# Altium PCB RD15002SCT拼板20160225.PcbDoc (part 1 of 2)
Units mil, origin at the board's own origin, x right, y up, seen from the top; angles counter-clockwise.
Board outline 2710 x 2010 mil, 2 copper layers (Top Layer, Bottom Layer); 365 components, 184 nets, 1158 pads, 288 vias.
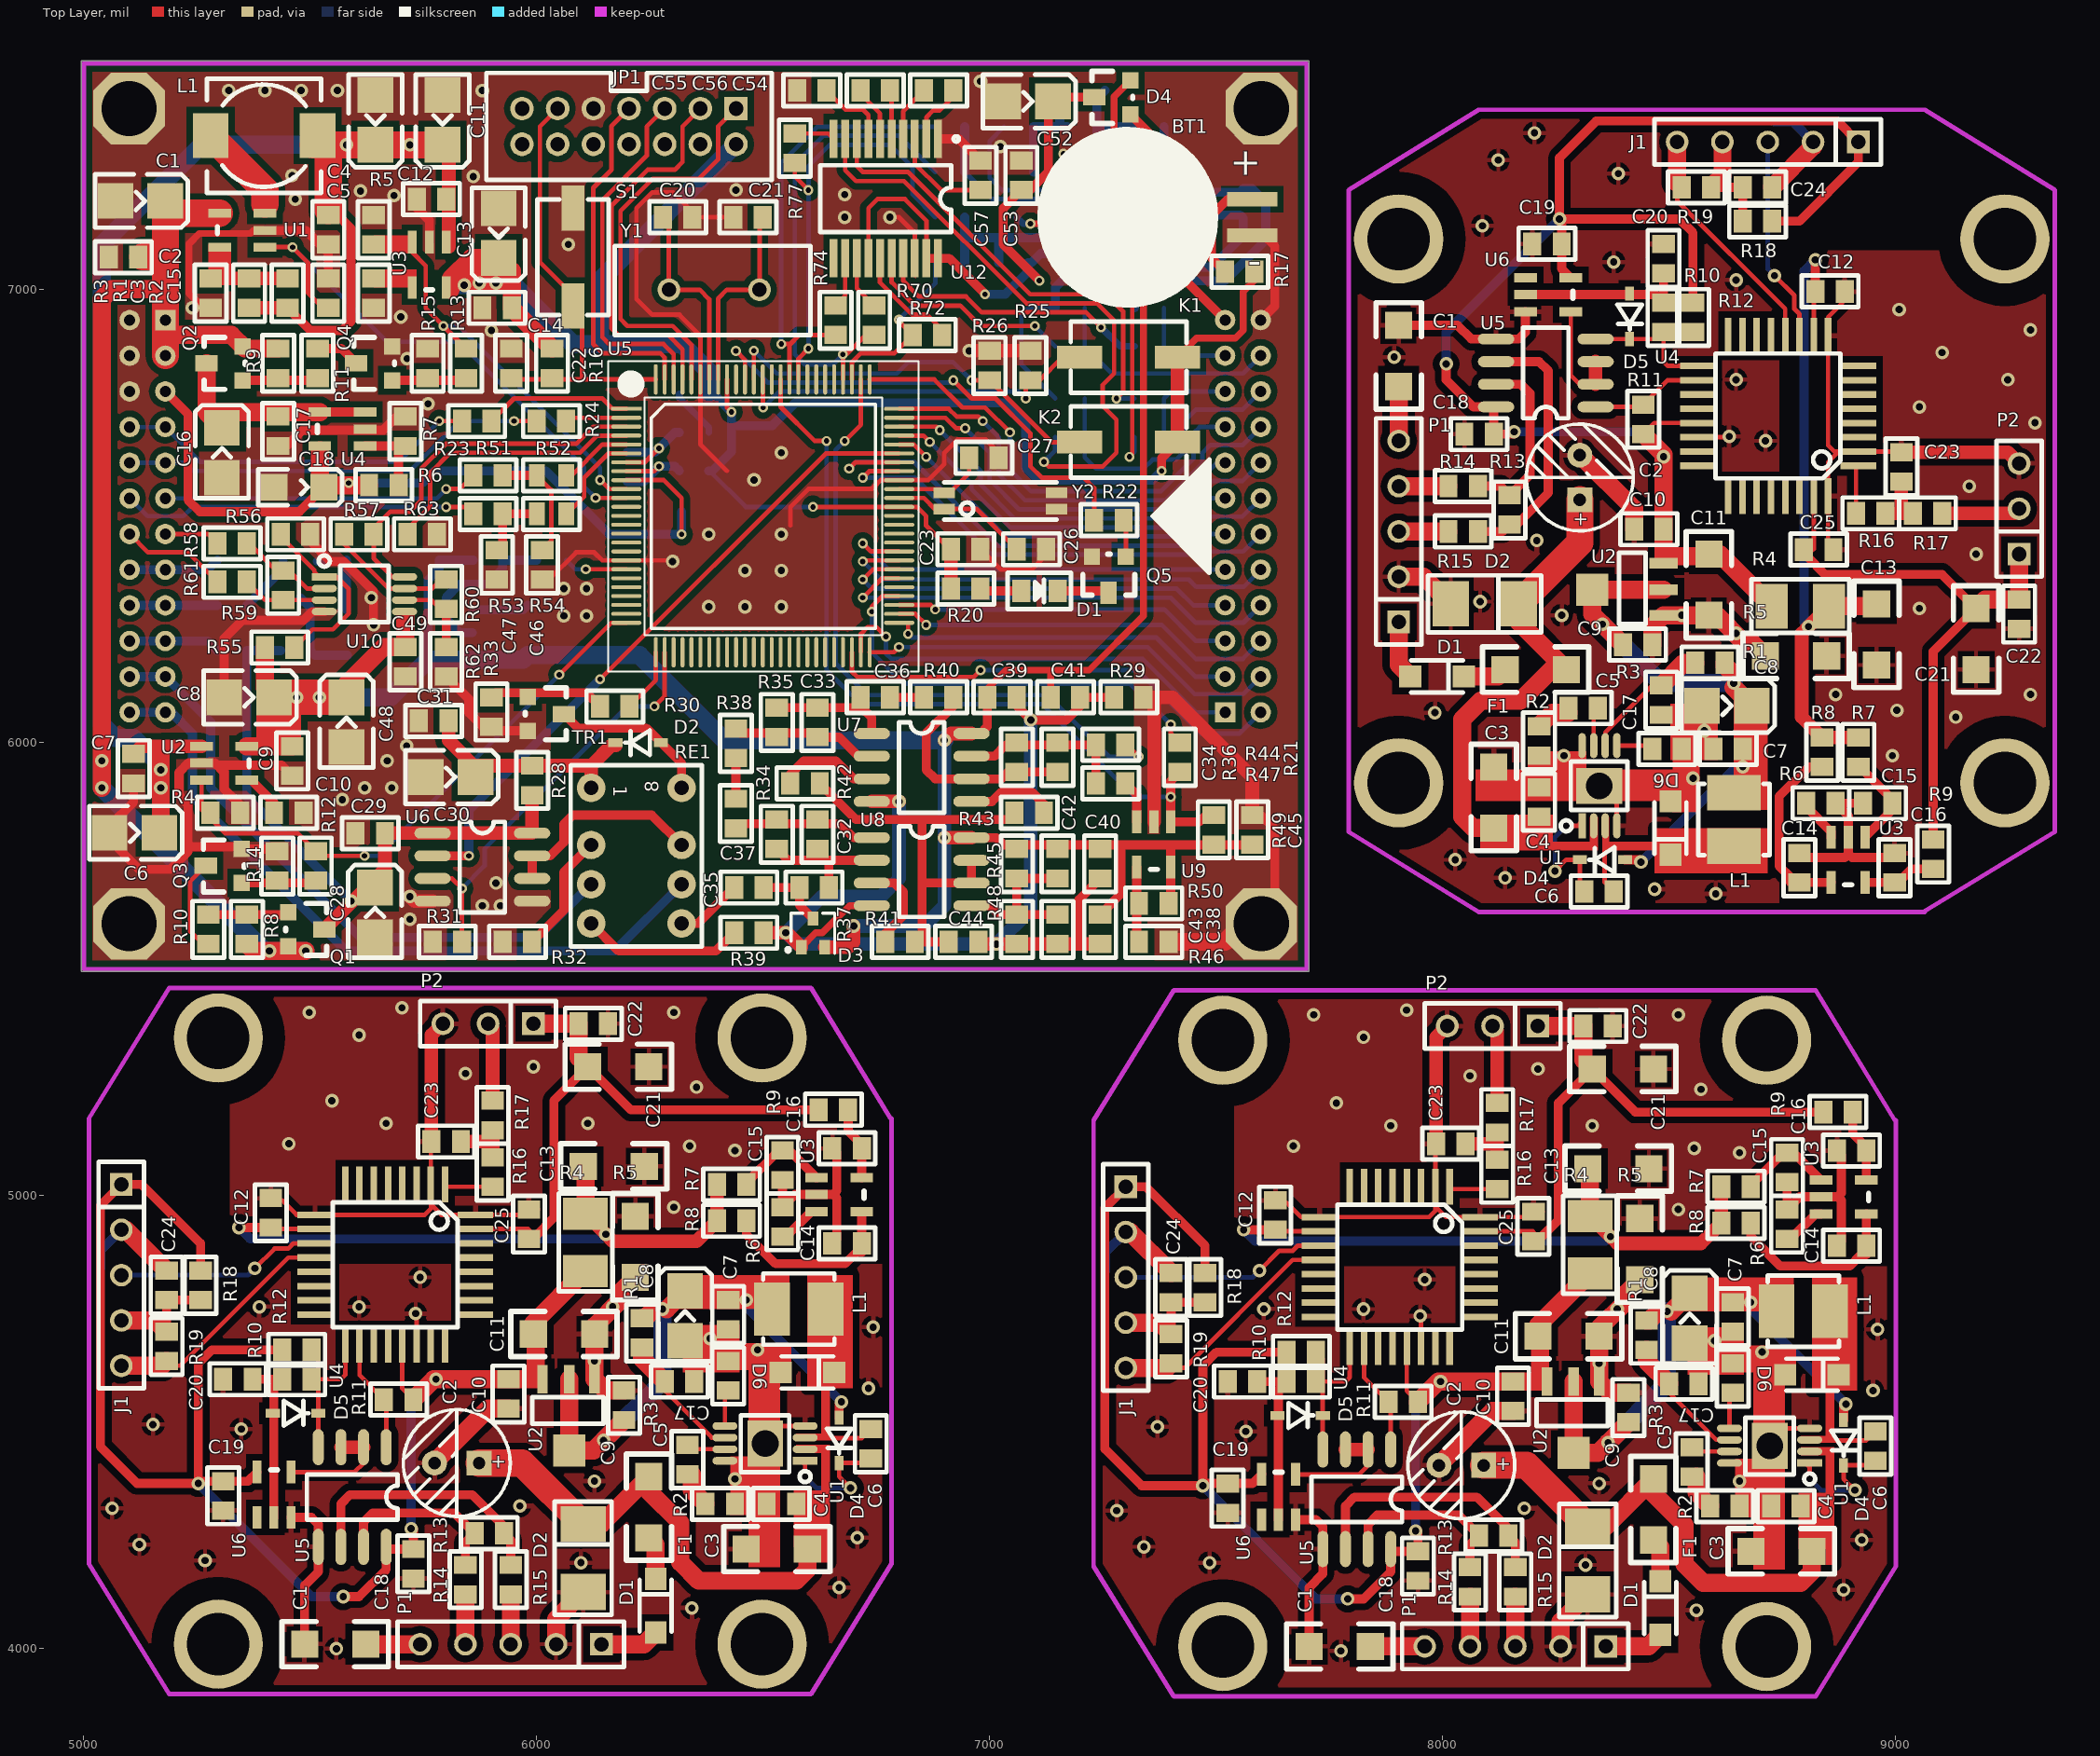
[diagram p0: Top Layer view]
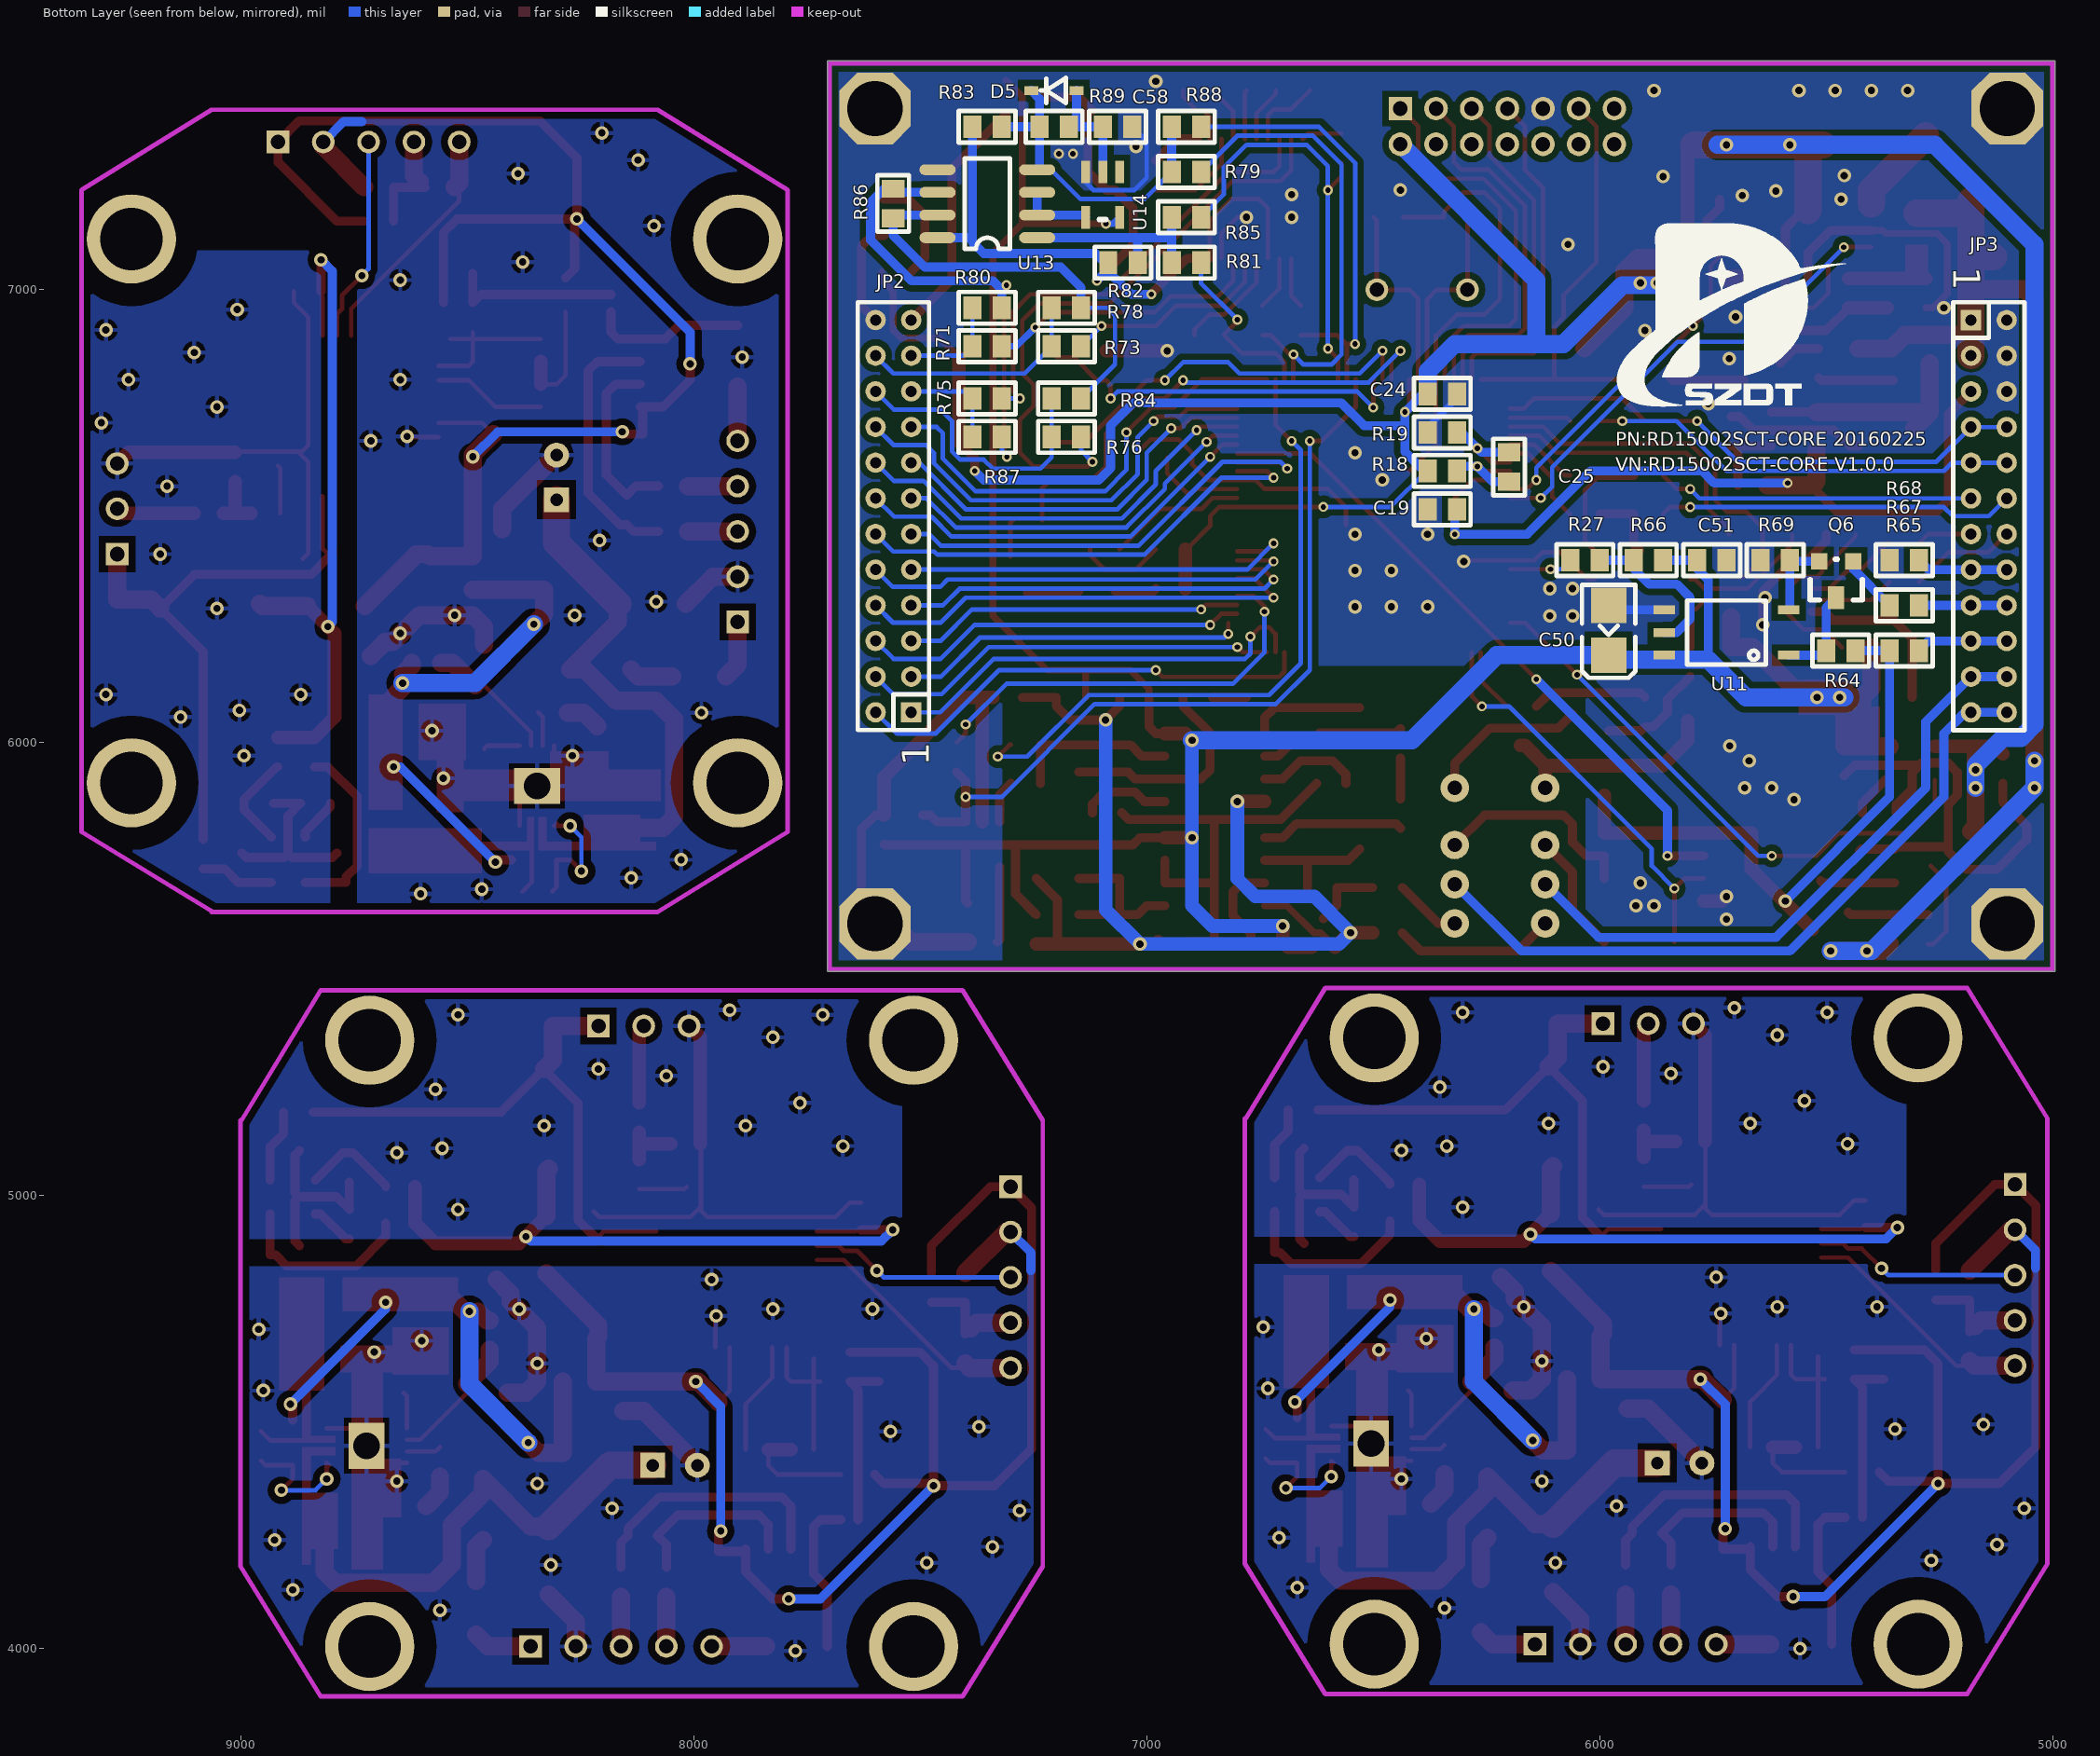
[diagram p1: Bottom Layer view, seen from below]

## Layer stack, top to bottom
Top Layer: signal copper 1.4
Dielectric: dielectric 12.6, FR-4, Dk 4.8
Bottom Layer: signal copper 1.4

## Board outline
4995,5495 7705,5495 7705,7505 4995,7505 4995,5495

## Design rules (kind name [scope] priority, off if disabled: settings)
Clearance [All] p1: gap=6
ComponentClearance [All] p1 off: gap=10 collisioncheckmode=3 verticalgap=10 showdistances=FALSE
HoleSize [All] p1: absolutevalues=TRUE maxlimit=1000 minlimit=1 maxpercent=80.000 minpercent=20.000
MinimumSolderMaskSliver [All] p1 off: minsoldermaskwidth=10
NetAntennae [All] p1 off: netantennaetolerance=0
PolygonConnect [All] p1: connectstyle=Direct reliefconductorwidth=10 reliefentries=4 polygonreliefangle="90 Angle" airgapwidth=10
RoutingPriority [All] p1: routingpriority=1
RoutingVias [All] p1: holewidth=20 width=50 viastyle="Through Hole" minholewidth=28 minwidth=50 maxholewidth=28 maxwidth=50
SilkToSilkClearance [All] p1 off: silktosilkclearance=10
SilkToSolderMaskClearance [IsPad] p1 off: minsilkscreentomaskgap=10 clearancetoexposedcopper=TRUE
SolderMaskExpansion [All] p1: expansion=4
Width [All] p1: maxlimit=1000 minlimit=6 preferedwidth=10
21 further rules are at their usual default settings.

## Components (designator, comment, footprint, x,y, rotation, side; value= is the part's Value field where it differs from the comment)
BT1 "MS920T" MS920T 7580,7200 r0 top
C1 "0.1uF/1KV" CC1206 7705.73,4004.24 r0 top
C1 "0.1uF/1KV" CC1206 5487.73,4009.24 r0 top
C1 "0.1uF/1KV" CC1206 7903.24,6921.27 r270 top
C1 "22uF/16V" CB3528 5180,7196 r180 top
C2 "100uF/25V" EC2.5/6MM 8090.73,4404.24 r180 top
C2 "100uF/25V" EC2.5/6MM 5872.73,4409.24 r180 top
C2 "100uF/25V" EC2.5/6MM 8303.24,6536.27 r90 top
C2 "0.1uF" CC0603#1 5055,7071.94 r0 top
C3 "10uF" CC1206 8680.73,4214.24 r0 top
C3 "10uF" CC1206 6462.73,4219.24 r0 top
C3 "10uF" CC1206 8113.24,5946.27 r270 top
C3 "100pF" CC0603#1 5450,7025 r270 top
C4 "0.1uF" CC0603#1 8725.73,4314.24 r0 top
C4 "0.1uF" CC0603#1 6507.73,4319.24 r0 top
C4 "0.1uF" CC0603#1 8213.24,5901.27 r270 top
C4 "22uF/16V" CB3528 5644,7320 r90 top
C5 "1.5nF" CC0603#1 8550.73,4379.24 r90 top
C5 "1.5nF" CC0603#1 6332.73,4384.24 r90 top
C5 "1.5nF" CC0603#1 8278.24,6076.27 r0 top
C5 "0.1uF" CC0603#1 5540,7100 r90 top
C6 "10nF" CC0603#1 8955.73,4479.24 r270 top
C6 "10nF" CC0603#1 6737.73,4484.24 r270 top
C6 "10nF" CC0603#1 8378.24,5671.27 r180 top
C6 "22uF/16V" CB3528 5167,5801 r180 top
C7 "0.1uF" CC0603#1 8640.73,4699.24 r90 top
C7 "0.1uF" CC0603#1 6422.73,4704.24 r90 top
C7 "0.1uF" CC0603#1 8598.24,5986.27 r0 top
C7 "0.1uF" CC0603#1 5110,5910 r90 top
C8 "22uF/6.3V" CB3528 8545.73,4784.24 r270 top
C8 "22uF/6.3V" CB3528 6327.73,4789.24 r270 top
C8 "22uF/6.3V" CB3528 8683.24,6081.27 r180 top
C8 "22uF/16V" CB3528 5420,6100 r180 top
C9 "0.1uF" CC0603#1 8410.73,4564.24 r270 top
C9 "0.1uF" CC0603#1 6192.73,4569.24 r270 top
C9 "0.1uF" CC0603#1 8463.24,6216.27 r180 top
C9 "0.1uF" CC0603#1 5460,5927 r90 top
C10 "0.1uF" CC0603#1 8155.73,4524.24 r90 top
C10 "0.1uF" CC0603#1 5937.73,4529.24 r90 top
C10 "0.1uF" CC0603#1 8423.24,6471.27 r0 top
C10 "0.1uF" CC0603#1 5485,5845 r180 top
C11 "10uF" CC1206 8345.73,4689.24 r180 top
C11 "10uF" CC1206 6127.73,4694.24 r180 top
C11 "10uF" CC1206 8588.24,6281.27 r90 top
C11 "22uF/16V" CB3528 5792.11,7320 r90 top
C12 "0.1uF" CC0603#1 7630.73,4989.24 r270 top
C12 "0.1uF" CC0603#1 5412.73,4994.24 r270 top
C12 "0.1uF" CC0603#1 8888.24,6996.27 r180 top
C12 "0.1uF" CC0603#1 5735,7200 r0 top
C13 "10uF" CC1206 8455.73,5059.24 r180 top
C13 "10uF" CC1206 6237.73,5064.24 r180 top
C13 "10uF" CC1206 8958.24,6171.27 r90 top
C13 "22uF/16V" CB3528 5916,7070 r90 top
C14 "0.1uF" CC0603#1 8935.73,4889.24 r180 top
C14 "0.1uF" CC0603#1 6717.73,4894.24 r180 top
C14 "0.1uF" CC0603#1 8788.24,5691.27 r90 top
C14 "0.1uF" CC0603#1 5880,6960 r0 top
C15 "0.1uF" CC0603#1 8760.73,5029.24 r90 top
C15 "0.1uF" CC0603#1 6542.73,5034.24 r90 top
C15 "0.1uF" CC0603#1 8928.24,5866.27 r0 top
C15 "0.1uF" CC0603#1 5640,6960 r90 top
C16 "0.1uF" CC0603#1 8870.73,5099.24 r0 top
C16 "0.1uF" CC0603#1 6652.73,5104.24 r0 top
C16 "0.1uF" CC0603#1 8998.24,5756.27 r270 top
C16 "22uF/16V" CB3528 5305,6695 r270 top
C17 "10nF" CC0603#1 8640.73,4629.24 r270 top
C17 "10nF" CC0603#1 6422.73,4634.24 r270 top
C17 "10nF" CC0603#1 8528.24,5986.27 r180 top
C17 "0.1uF" CC0603#1 5429.06,6655 r90 top
C18 "0.1uF" CC0603#1 7945.73,4149.24 r90 top
C18 "0.1uF" CC0603#1 5727.73,4154.24 r90 top
C18 "0.1uF" CC0603#1 8048.24,6681.27 r0 top
C18 "10uF/16V" CA3216 5530,6564 r180 top
C19 "0.1uF" CC0603#1 7525.73,4299.24 r90 top
C19 "0.1uF" CC0603#1 5307.73,4304.24 r90 top
C19 "0.1uF" CC0603#1 8198.24,7101.27 r0 top
C19 "0.1uF" CC0603#1 6380,6515 r180 bottom
C20 "100pF" CC0603#1 7525.73,4589.24 r0 top
C20 "100pF" CC0603#1 5307.73,4594.24 r0 top
C20 "100pF" CC0603#1 8488.24,7101.27 r270 top
C20 "22pF" CC0603#1 6344,7160 r180 top
C21 "10uF" CC1206 8465.73,5279.24 r180 top
C21 "10uF" CC1206 6247.73,5284.24 r180 top
C21 "10uF" CC1206 9178.24,6161.27 r90 top
C21 "22pF" CC0603#1 6434,7160 r0 top
C22 "0.1uF" CC0603#1 8375.73,5374.24 r180 top
C22 "0.1uF" CC0603#1 6157.73,5379.24 r180 top
C22 "0.1uF" CC0603#1 9273.24,6251.27 r90 top
C22 "1uF" CC0603#1 5943.98,6870 r270 top
C23 "10nF" CC0603#1 7985.73,5114.24 r0 top
C23 "10nF" CC0603#1 5767.73,5119.24 r0 top
C23 "10nF" CC0603#1 9013.24,6641.27 r270 top
C23 "0.1uF" CC0603#1 6980,6427 r180 top
C24 "1uF" CC0603#1 7400.73,4829.24 r270 top
C24 "1uF" CC0603#1 5182.73,4834.24 r270 top
C24 "1uF" CC0603#1 8728.24,7226.27 r180 top
C24 "0.1uF" CC0603#1 6315,6770 r0 bottom
C25 "0.1uF" CC0603#1 8200.73,4899.24 r90 top
C25 "0.1uF" CC0603#1 5982.73,4904.24 r90 top
C25 "0.1uF" CC0603#1 8798.24,6426.27 r0 top
C25 "0.1uF" CC0603#1 6200,6641 r270 bottom
C26 "22pF" CC0603#1 7060,6427 r0 top
C27 "22pF" CC0603#1 6955,6629 r0 top
C28 "22uF/16V" CB3528 5643,5680 r270 top
C29 "0.1uF" CC0603#1 5600,5800 r0 top
C30 "22uF/16V" CB3528 5865,5924 r180 top
C31 "0.1uF" CC0603#1 5805,6048.06 r180 top
C32 "330pF" CC0603#1 6620,5830 r270 top
C33 "330pF" CC0603#1 6620,6077 r270 top
C34 "330pF" CC0603#1 7060,6000 r270 top
C35 "0.1uF" CC0603#1 6501,5680 r180 top
C36 "0.1uF" CC0603#1 6780,6100 r180 top
C37 "0.1uF" CC0603#1 6440,5876 r270 top
C38 "1uF" CC0603#1 7244,5555 r90 top
C39 "1uF" CC0603#1 7060,6100 r180 top
C40 "10nF" CC0603#1 7244,5765 r270 top
C41 "10nF" CC0603#1 7135,6100 r0 top
C42 "0.1uF" CC0603#1 7150,5765 r270 top
C43 "0.1uF" CC0603#1 7150,5620 r270 top
C44 "1uF" CC0603#1 6975,5560 r180 top
C45 "0.1uF" CC0603#1 7580,5840 r270 top
C46 "0.1uF" CC0603#1 6012,6425 r270 top
C47 "0.1uF" CC0603#1 5912,6425 r270 top
C48 "22uF/16V" CB3528 5580,6100 r270 top
C49 "0.1uF" CC0603#1 5710,6146 r90 top
C50 "22uF/16V" CB3528 5980,6193 r90 bottom
C51 "0.1uF" CC0603#1 5720,6403 r0 bottom
C52 "22uF/16V" CB3528 7140,7416 r180 top
C53 "0.1uF" CC0603#1 7070,7285 r270 top
C54 "0.1uF" CC0603#1 6855,7440.07 r0 top
C55 "0.1uF" CC0603#1 6575,7440 r0 top
C56 "0.1uF" CC0603#1 6715,7440.07 r0 top
C57 "0.1uF" CC0603#1 6980,7285 r270 top
C58 "100pF" CC0603#1 7032,7360 r0 bottom
D1 "MBR140" SOD-123 8480.73,4089.24 r90 top
D1 "MBR140" SOD-123 6262.73,4094.24 r90 top
D1 "MBR140" SOD-123 7988.24,6146.27 r0 top
D1 "LED" D0805 7070,6335 r0 top
D2 "SMAJ15A" SSMA 8320.73,4119.24 r270 top
D2 "SMAJ15A" SSMA 6102.73,4124.24 r270 top
D2 "SMAJ15A" SSMA 8018.24,6306.27 r180 top
D2 "CMDSH-3" SOD323 6274,6000 r180 top
D3 "DESD1P0RFW-7" SOT-323 6610,5580 r90 top
D4 "CMDSH-3" SOD323 8885.73,4504.24 r270 top
D4 "CMDSH-3" SOD323 6667.73,4509.24 r270 top
D4 "CMDSH-3" SOD323 8403.24,5741.27 r180 top
D4 "DIODE-CC" SOT-23W 7311,7387 r90 top
D5 "1N4148" SOD323 7635.73,4514.24 r0 top
D5 "1N4148" SOD323 5417.73,4519.24 r0 top
D5 "1N4148" SOD323 8413.24,6991.27 r270 top
D5 "1N4148" SOD323 7155,7440 r0 bottom
D6 "MBR140" SOD-123 8815.73,4604.24 r0 top
D6 "MBR140" SOD-123 6597.73,4609.24 r0 top
D6 "MBR140" SOD-123 8503.24,5811.27 r270 top
F1 "100mA" CC1206 8465.73,4239.24 r90 top
F1 "100mA" CC1206 6247.73,4244.24 r90 top
F1 "100mA" CC1206 8138.24,6161.27 r0 top
J1 "JTAG" SIP5-2.54 7300.73,5019.24 r270 top
J1 "JTAG" SIP5-2.54 5082.73,5024.24 r270 top
J1 "JTAG" SIP5-2.54 8918.24,7326.27 r180 top
JP1 "JTAG" IDC14-2.0MM 6440,7400 r180 top
JP2 "Header2*12" IDC24-2.0MM-INSERT 7520,6067 r90 bottom
JP3 "Header2*12" IDC24-2.0MM-INSERT 5180,6933 r270 bottom
K1 "F4" SPST 7199,6851 r0 top
K2 "F3" SPST 7199,6663.52 r0 top
L1 "10uH" CD3 8855.73,4744.24 r180 top
L1 "10uH" CD3 6637.73,4749.24 r180 top
L1 "10uH" CD3 8643.24,5771.27 r90 top
L1 "10uH" SLF6025 5280,7340 r0 top
P1 "PWR" SIP5-2.54 8360.73,4004.24 r180 top
P1 "PWR" SIP5-2.54 6142.73,4009.24 r180 top
P1 "PWR" SIP5-2.54 7903.24,6266.27 r90 top
P2 "TRANSDUCER" SIP3-2.54 8210.73,5374.24 r180 top
P2 "TRANSDUCER" SIP3-2.54 5992.73,5379.24 r180 top
P2 "TRANSDUCER" SIP3-2.54 9273.24,6416.27 r90 top
Q1 "CJ2301" SOT-23W 5451,5625 r270 top
Q2 "CJ2301" SOT-23W 5351,6800 r90 top
Q3 "MMBT3904" SOT-23W 5349.01,5690 r90 top
Q4 "MMBT3904" SOT-23W 5680.99,6800.02 r90 top
Q5 "MMBT3904" SOT-23W 7301,6411 r180 top
Q6 "MMBT3904" SOT-23W 5440,6400 r0 bottom
R1 "47K" CC0603#1 8450.73,4724.24 r270 top
R1 "47K" CC0603#1 6232.73,4729.24 r270 top
R1 "47K" CC0603#1 8623.24,6176.27 r180 top
R1 "105K" CC0603#1 5365,6960 r90 top
R2 "4.7K" CC0603#1 8655.73,4314.24 r180 top
R2 "4.7K" CC0603#1 6437.73,4319.24 r180 top
R2 "4.7K" CC0603#1 8213.24,5971.27 r90 top
R2 "100K" CC0603#1 5540,6960 r90 top
R3 "20K" CC0603#1 8565.73,4584.24 r180 top
R3 "20K" CC0603#1 6347.73,4589.24 r180 top
R3 "20K" CC0603#1 8483.24,6061.27 r90 top
R3 "20K" CC0603#1 5280,7025 r270 top
R4 "2R2" CC1210 8325.73,4954.24 r270 top
R4 "2R2" CC1210 6107.73,4959.24 r270 top
R4 "2R2" CC1210 8853.24,6301.27 r180 top
R4 "100K" CC0603#1 5280,5845 r0 top
R5 "0" CC1206 8435.73,4949.24 r270 top
R5 "0" CC1206 6217.73,4954.24 r270 top
R5 "0" CC1206 8848.24,6191.27 r180 top
R5 "100K" CC0603#1 5640,7100 r90 top
R6 "0" cc0603 8760.73,4904.24 r90 top
R6 "0" cc0603 6542.73,4909.24 r90 top
R6 "0" cc0603 8803.24,5866.27 r0 top
R6 "20K" CC0603#1 5630,6568.37 r0 top
R7 "0" CC0603#1 8615.73,5019.24 r0 top
R7 "0" CC0603#1 6397.73,5024.24 r0 top
R7 "0" CC0603#1 8918.24,6011.27 r270 top
R7 "20K" CC0603#1 5710,6655 r90 top
R8 "0" CC0603#1 8615.73,4939.24 r0 top
R8 "0" CC0603#1 6397.73,4944.24 r0 top
R8 "0" CC0603#1 8838.24,6011.27 r270 top
R8 "47K 1%" CC0603#1 5359.99,5555.02 r90 top
R9 "0" CC0603#1 8840.73,5184.24 r0 top
R9 "0" CC0603#1 6622.73,5189.24 r0 top
R9 "0" CC0603#1 9083.24,5786.27 r270 top
R9 "47K 1%" CC0603#1 5428.99,6870 r270 top
R10 "10K" CC0603#1 7655.73,4589.24 r0 top
R10 "10K" CC0603#1 5437.73,4594.24 r0 top
R10 "10K" CC0603#1 8488.24,6971.27 r270 top
R10 "47K" CC0603#1 5274.99,5620.02 r270 top
R11 "10K" CC0603#1 7880.73,4544.24 r0 top
R11 "10K" CC0603#1 5662.73,4549.24 r0 top
R11 "10K" CC0603#1 8443.24,6746.27 r270 top
R11 "47K" CC0603#1 5515.99,6805 r90 top
R12 "10K" CC0603#1 7720.73,4654.24 r180 top
R12 "10K" CC0603#1 5502.73,4659.24 r180 top
R12 "10K" CC0603#1 8553.24,6906.27 r90 top
R12 "4.7K" CC0603#1 5512,5759.98 r270 top
R13 "100" CC0603#1 8080.73,4249.24 r0 top
R13 "100" CC0603#1 5862.73,4254.24 r0 top
R13 "100" CC0603#1 8148.24,6546.27 r270 top
R13 "4.7K" CC0603#1 5843.98,6870 r270 top
R14 "10" CC0603#1 8060.73,4114.24 r90 top
R14 "10" CC0603#1 5842.73,4119.24 r90 top
R14 "10" CC0603#1 8013.24,6566.27 r0 top
R14 "10K" CC0603#1 5427,5694.98 r90 top
R15 "10" CC0603#1 8160.73,4114.24 r90 top
R15 "10" CC0603#1 5942.73,4119.24 r90 top
R15 "10" CC0603#1 8013.24,6466.27 r0 top
R15 "10K" CC0603#1 5758.98,6805 r90 top
R16 "470" CC0603#1 8120.73,5014.24 r90 top
R16 "470" CC0603#1 5902.73,5019.24 r90 top
R16 "470" CC0603#1 8913.24,6506.27 r0 top
R16 "10K" CC0603#1 6034,6805 r90 top
R17 "470" CC0603#1 8120.73,5139.24 r90 top
R17 "470" CC0603#1 5902.73,5144.24 r90 top
R17 "470" CC0603#1 9038.24,6506.27 r0 top
R17 "22R" CC0603#1 7585,7040 r180 top
R18 "1K" CC0603#1 7475.73,4829.24 r270 top
R18 "1K" CC0603#1 5257.73,4834.24 r270 top
R18 "1K" CC0603#1 8728.24,7151.27 r180 top
R18 "0" CC0603#1 6315,6600 r0 bottom
R19 "1K" CC0603#1 7400.73,4694.24 r270 top
R19 "1K" CC0603#1 5182.73,4699.24 r270 top
R19 "1K" CC0603#1 8593.24,7226.27 r180 top
R19 "0" CC0603#1 6315,6685 r0 bottom
R20 "200R" CC0603#1 6980,6340 r180 top
R21 "0" CC0603#1 7420,5935 r90 top
R22 "1K" CC0603#1 7296,6491 r180 top
R23 "0" CC0603#1 5900,6710 r180 top
R24 "0" CC0603#1 6065,6710 r180 top
R25 "12K" CC0603#1 7090,6865 r270 top
R26 "12K" CC0603#1 7000,6865 r270 top
R27 "0" CC0603#1 6065,6403 r180 bottom
R28 "10" CC0603#1 5990,5884 r90 top
R29 "0R" CC0603#1 7275,6100 r0 top
R30 "10K" CC0603#1 6205,6080 r180 top
R31 "100K" CC0603#1 5835,5560 r180 top
R32 "100" CC0603#1 5990,5560 r180 top
R33 "100K" CC0603#1 5900,6035 r90 top
R34 "100K" CC0603#1 6530,5830 r270 top
R35 "100K" CC0603#1 6530,6077 r270 top
R36 "100K" CC0603#1 7150,6000 r270 top
R37 "4.7K" CC0603#1 6645,5680 r180 top
R38 "4.7K" CC0603#1 6440,6031 r270 top
R39 "100" CC0603#1 6436,5580 r0 top
R40 "4.7K" CC0603#1 6920,6100 r180 top
R41 "0R" CC0603#1 6770,5560 r0 top
R42 "0R" CC0603#1 6560,5910 r0 top
R43 "0R" CC0603#1 7120,5845 r180 top
R44 "1K" CC0603#1 7235,5995 r0 top
R45 "100K 1%" CC0603#1 7060,5765 r270 top
R46 "100K" CC0603#1 7330,5560 r0 top
R47 "1K" CC0603#1 7300,5910 r180 top
R48 "100K 1%" CC0603#1 7060,5620 r270 top
R49 "10K" CC0603#1 7495,5775 r90 top
R50 "100K" CC0603#1 7395,5645 r180 top
R51 "1K" CC0603#1 5925,6590 r180 top
R52 "1K" CC0603#2 6065,6590 r180 top
R53 "1K" CC0603#1 5925,6505 r180 top
R54 "1K" CC0603#2 6065,6505 r180 top
R55 "0" CC0603#1 5465,6210 r180 top
R56 "0" CC0603#1 5500,6460 r180 top
R57 "49.9K 1%" CC0603#1 5575,6460 r0 top
R58 "100K" CC0603#1 5360,6440 r180 top
R59 "49.9K" CC0603#1 5440,6380 r270 top
R60 "49.9K 1%" CC0603#1 5800,6360 r270 top
R61 "100K" CC0603#1 5360,6355 r180 top
R62 "0R" CC0603#1 5800,6211 r270 top
R63 "0R" CC0603#1 5715,6460 r0 top
R64 "0" CC0603#1 5435,6203 r0 bottom
R65 "3.3K" CC0603#1 5360,6203 r180 bottom
R66 "0" CC0603#1 5860,6403 r0 bottom
R67 "1K" CC0603#1 5295,6303 r0 bottom
R68 "0" CC0603#1 5295,6403 r0 bottom
R69 "470" CC0603#1 5580,6403 r0 bottom
R70 "0R" CC0603#1 6745,6900 r90 top
R71 "0R" CC0603#1 7320,6875 r0 bottom
R72 "0R" CC0603#1 6830,6900 r0 top
R73 "0R" CC0603#1 7145,6875 r0 bottom
R74 "0R" CC0603#1 6660,6900 r90 top
R75 "0R" CC0603#1 7320,6760 r0 bottom
R76 "0R" CC0603#1 7145,6675 r0 bottom
R77 "0R" CC0603#1 6570,7280 r90 top
R78 "0R" CC0603#1 7145,6960 r0 bottom
R79 "0R" CC0603#1 6880,7260 r0 bottom
R80 "0R" CC0603#1 7320,6960 r0 bottom
R81 "0R" CC0603#1 6880,7060 r0 bottom
R82 "10K" CC0603#1 7020,7060 r0 bottom
R83 "10K" CC0603#1 7320,7360 r0 bottom
R84 "0R" CC0603#1 7145,6760 r0 bottom
R85 "0R" CC0603#1 6880,7160 r0 bottom
R86 "120R" CC0603#1 7560,7223 r270 bottom
R87 "0R" CC0603#1 7320,6675 r0 bottom
R88 "0R" CC0603#1 6880,7360 r0 bottom
R89 "10K" CC0603#1 7172,7360 r0 bottom
RE1 "G6K" G6K 6120,5900 r270 top
S1 "RESET" SPST 6080,7180 r270 top
TR1 "MMBT3904" SOT-23W 5980,6101 r270 top
U1 "LT1767" MS8 8810.73,4409.24 r180 top
U1 "LT1767" MS8 6592.73,4414.24 r180 top
U1 "LT1767" MS8 8308.24,5816.27 r90 top
U1 "TPS560200" SOT-23-5 5400,7094 r270 top
U2 "GM6250-3.3ST89R" SOT-89 8345.73,4589.24 r180 top
U2 "GM6250-3.3ST89R" SOT-89 6127.73,4594.24 r180 top
U2 "GM6250-3.3ST89R" SOT-89 8488.24,6281.27 r90 top
U2 "LP2985-3.3" SOT-23-5 5260,5992 r90 top
U3 "LM4128" SOT-23-5 8835.73,5034.24 r90 top
U3 "LM4128" SOT-23-5 6617.73,5039.24 r90 top
U3 "LM4128" SOT-23-5 8933.24,5791.27 r0 top
U3 "LP2985-3.3" SOT-23-5 5800,7105 r0 top
U4 "C8051F350" LQFP32 8015.73,5019.24 r270 top
U4 "C8051F350" LQFP32 5797.73,5024.24 r270 top
U4 "C8051F350" LQFP32 8918.24,6611.27 r180 top
U4 "LM4121-ADJ/1.2" SOT-23-5 5621,6655 r270 top
U5 "SN65HVD72/75/78" SO-8 7885.73,4439.24 r270 top
U5 "SN65HVD72/75/78" SO-8 5667.73,4444.24 r270 top
U5 "SN65HVD72/75/78" SO-8 8338.24,6741.27 r180 top
U5 "MSP430F47126" TQFP100 6198,6737 r0 top locked
U6 "74HC1G14" SOT-23-5 7600.73,4284.24 r180 top
U6 "74HC1G14" SOT-23-5 5382.73,4289.24 r180 top
U6 "74HC1G14" SOT-23-5 8183.24,7026.27 r90 top
U6 "FAN3122T" SO-8 5770,5800 r0 top
U7 "LT1807" SO-8 6740,6020 r0 top
U8 "LT1807" SO-8 6740,5790 r0 top
U9 "TLV3491AID" SOT-23-5 7400,5825 r0 top
U10 "AD8237" MSOP8 5531,6366 r0 top
U11 "PC410" PC410 5720,6243 r90 bottom
U12 "MAX3223EEAP" TSSOP20 6886,7333.07 r270 top
U13 "SN65HVD72/75/78" SO-8 7242,7115 r0 bottom
U14 "74HC1G14" SOT-23-5 7060,7260 r180 bottom
Y1 "1M" XCYAI 6392,7000 r0 top
Y2 "32.768KHz" MC-146 6900,6516 r0 top
? "" LOGO 5735,6945 r180 bottom

## Footprints (in the part's own frame and the unit in brackets; to place one, negate y for a bottom-side part, rotate by r counter-clockwise, add the part's x,y. Pads: shape width x height; smd on the part's side, far side on the other; paste and mask are expansions set on the pad)
CA3216 [mm]
  rect 1.5x1.5 smd: 1(0,0) 2(2.794,0)
  silkscreen extent -1.02,-1 3.68,1
CB3528 [mm]
  rect 2x2 smd: 1(0,0) 2(2.794,0)
  silkscreen extent -1.27,-1.5 3.94,1.5
CC0603#1 [mil]
  rect 40x50 smd: 1(0,0) 2(65,0)
  silkscreen extent -30,-35 95,35
CC0603#2 [mil]
  rect 35x50 smd: 1(0,0) 2(65,0)
  silkscreen extent -30,-35 95,35
cc0603 [mil]
  rect 40x50 smd: 1(0,0) 2(65,0)
  silkscreen extent -30,-35 95,35
CC1206 [mil]
  rect 60x60 smd: 1(0,0) 2(135,0)
  silkscreen extent -50,-50 185,50
CC1210 [mm]
  rect 1.8x2.5 smd: 1(0,0) 2(3.2,0)
  silkscreen extent -1.15,-1.5 4.35,1.5
CD3 [mm]
  rect 2x3 smd: 1(0,0) 2(3,0)
  silkscreen extent -0.5,-2 3.5,2
D0805 [mil]
  rect 40x50 smd: 1(0,0) 2(80,0)
  silkscreen extent -30,-40 110,40
EC2.5/6MM [mm] "Electrolytic Capacitor ; Pin Spacing 2.5 mm ; Body diameter 6.0 mm"
  rect 1.4x1.4 hole 0.7: 1(0,0)
  round 1.4 hole 0.7: 2(2.5,0)
  silkscreen extent -1.75,-3 4.25,3
G6K [mm]
  round 1.6 hole 0.8: 1(0,0) 2(3.2,0) 3(5.4,0) 4(7.6,0) 5(7.6,5.08) 6(5.4,5.08) 7(3.2,5.08) 8(0,5.08)
  silkscreen extent -1.27,-1.14 8.89,6.22
IDC14-2.0MM [mil]
  rect 52x52 hole 32: 1(0,0)
  round 52 hole 32: 2(0,78.74) 3(78.74,0) 4(78.74,78.74) 5(157.48,0) 6(157.48,78.74) 7(236.22,0) 8(236.22,78.74) 9(314.96,0) 10(314.96,78.74) 11(393.7,0) 12(393.7,78.74) 13(472.44,0) 14(472.44,78.74)
  silkscreen extent -79,-79 551,157
IDC24-2.0MM-INSERT [mil]
  rect 45x45 hole 25: 1(0,0)
  round 45 hole 25: 2(0,78.74) 3(78.74,0) 4(78.74,78.74) 5(157.48,0) 6(157.48,78.74) 7(236.22,0) 8(236.22,78.74) 9(314.96,0) 10(314.96,78.74) 11(393.7,0) 12(393.7,78.74) 13(472.44,0) 14(472.44,78.74) 15(551.18,0) 16(551.18,78.74) 17(629.92,0) 18(629.92,78.74) 19(708.66,0) 20(708.66,78.74) 21(787.4,0) 22(787.4,78.74) 23(866.14,0) 24(866.14,78.74)
  silkscreen extent -39,-39 906,118
LOGO [mil]
  silkscreen extent -227,-203 278,200
LQFP32 [mm] "LQFP32"
  rect 2x0.37 smd: 1(0,0) 2(0,-0.8) 3(0,-1.6) 4(0,-2.4) 5(0,-3.2) 6(0,-4) 7(0,-4.8) 8(0,-5.6) 17(9,-5.6) 18(9,-4.8) 19(9,-4) 20(9,-3.2) 21(9,-2.4) 22(9,-1.6) 23(9,-0.8) 24(9,0)
  rect 0.37x2 smd: 9(1.7,-7.296) 10(2.5,-7.296) 11(3.3,-7.296) 12(4.1,-7.296) 13(4.9,-7.296) 14(5.7,-7.296) 15(6.5,-7.296) 16(7.3,-7.296) 25(7.3,1.704) 26(6.5,1.704) 27(5.7,1.704) 28(4.9,1.704) 29(4.1,1.704) 30(3.3,1.704) 31(2.5,1.704) 32(1.7,1.704)
  silkscreen extent 1,-6.3 8,0.7
MC-146 [mm]
  rect 1.2x0.6 smd: 1(0,0) 2(6.3,0) 3(6.3,0.9) 4(0,0.9)
  silkscreen extent 0,-0.6 6.3,1.5
MS8 [mm] "MS8"
  rect 1.4x0.42 smd: 1(0,0)
  oval 1.4x0.42 smd: 2(0,-0.65) 3(0,-1.3) 4(0,-1.95) 5(4.5,-1.95) 6(4.5,-1.3) 7(4.5,-0.65) 8(4.5,0)
  rect 2x2.6 hole 1.5: ""(2.235,-0.965)
  silkscreen extent -0.31,-2.54 3.61,1.2
MS920T [mm]
  rect 2.8x0.8 smd: 1(0,0) 2(0,-2.032)
  silkscreen extent -11.98,-6.02 -1.99,3.98
MSOP8 [mm]
  rect 1.4x0.42 smd: 1(0,0)
  oval 1.4x0.42 smd: 2(0,-0.65) 3(0,-1.3) 4(0,-1.95) 5(4.5,-1.95) 6(4.5,-1.3) 7(4.5,-0.65) 8(4.5,0)
  silkscreen extent -0.31,-2.54 3.61,1.2
PC410 [mm]
  rect 0.5x1.2 smd: 1(-1.27,-3.5) 3(1.27,-3.5) 4(1.27,3.5) 5(0,3.5) 6(-1.27,3.5)
  silkscreen extent -1.8,-2.2 1.8,2.2
SIP3-2.54 [mil] "SIP2.54"
  rect 50x50 hole 32: 1(0,0)
  round 50 hole 32: 2(100,0) 3(200,0)
  silkscreen extent -50,-50 250,50
SIP5-2.54 [mil] "SIP2.54"
  rect 50x50 hole 32: 1(0,0)
  round 50 hole 32: 2(100,0) 3(200,0) 4(300,0) 5(400,0)
  silkscreen extent -50,-50 450,50
SLF6025 [mm]
  rect 2x2.5 smd: 1(0,0) 2(6,0)
  silkscreen extent -0.2,-3.2 6.2,3.2
SO-8 [mil] "SO8"
  oval 80x24 smd: 1(0,0) 2(0,-50) 3(0,-100) 4(0,-150) 5(220,-150) 6(220,-100) 7(220,-50) 8(220,0)
  silkscreen extent 60,-175 160,25
SOD323 [mm]
  rect 0.8x0.5 smd: 1(0,0) 2(2.54,0)
  silkscreen extent 0.61,-0.7 2.01,0.7
SOD-123 [mm]
  rect 1.25x1.22 smd: 1(-1.5,0) 2(1.5,0)
  silkscreen extent -1.45,-0.9 1.45,0.9
SOT-23-5 [mil]
  rect 20x50 smd: 1(0,0) 2(-37,0) 3(-75,0) 4(-75,-100) 5(0,-100)
  silkscreen extent -45,-105 -30,-105
SOT-23W [mil]
  rect 35.98x35.98 smd: 1(0,0) 2(75,0)
  rect 35.98x50 smd: 3(37.99,80)
  silkscreen extent -20,-5 95,85
SOT-89 [mm]
  rect 0.6x1.6 smd: 1(0,0) 2(1.42,0) 3(2.92,0)
  rect 1.8x1.8 smd: 2(1.42,4)
  silkscreen extent -0.5,1 3.5,2.5
SOT-323 [mm]
  rect 0.8x0.6 smd: 1(-0.8,0.65) 2(-0.8,-0.65) 3(0.8,0)
  silkscreen extent -1.14,-1.22 1.09,1.49
SPST [mil]
  rect 100x50 smd: 1(0,0) 2(216,0)
  silkscreen extent -20,-79 236,79
SSMA [mil] "DIODE"
  rect 80x100 smd: 1(0,0) 2(-150,0)
  silkscreen extent -200,-63 50,63
TQFP100 [mm]
  rect 1.7x0.22 smd: 1(0,0)
  oval 1.7x0.22 smd: 2(0,-0.5) 3(0,-1) 4(0,-1.5) 5(0,-2) 6(0,-2.5) 7(0,-3) 8(0,-3.5) 9(0,-4) 10(0,-4.5) 11(0,-5) 12(0,-5.5) 13(0,-6) 14(0,-6.5) 15(0,-7) 16(0,-7.5) 17(0,-8) 18(0,-8.5) 19(0,-9) 20(0,-9.5) 21(0,-10) 22(0,-10.5) 23(0,-11) 24(0,-11.5) 25(0,-12) 51(15.3,-12) 52(15.3,-11.5) 53(15.3,-11) 54(15.3,-10.5) 55(15.3,-10) 56(15.3,-9.5) 57(15.3,-9) 58(15.3,-8.5) 59(15.3,-8) 60(15.3,-7.5) 61(15.3,-7) 62(15.3,-6.5) 63(15.3,-6) 64(15.3,-5.5) 65(15.3,-5) 66(15.3,-4.5) 67(15.3,-4) 68(15.3,-3.5) 69(15.3,-3) 70(15.3,-2.5) 71(15.3,-2) 72(15.3,-1.5) 73(15.3,-1) 74(15.3,-0.5) 75(15.3,0)
  oval 0.22x1.7 smd: 26(1.65,-13.65) 27(2.15,-13.65) 28(2.65,-13.65) 29(3.15,-13.65) 30(3.65,-13.65) 31(4.15,-13.65) 32(4.65,-13.65) 33(5.15,-13.65) 34(5.65,-13.65) 35(6.15,-13.65) 36(6.65,-13.65) 37(7.15,-13.65) 38(7.65,-13.65) 39(8.15,-13.65) 40(8.65,-13.65) 41(9.15,-13.65) 42(9.65,-13.65) 43(10.15,-13.65) 44(10.65,-13.65) 45(11.15,-13.65) 46(11.65,-13.65) 47(12.15,-13.65) 48(12.65,-13.65) 49(13.15,-13.65) 50(13.65,-13.65) 76(13.65,1.65) 77(13.15,1.65) 78(12.65,1.65) 79(12.15,1.65) 80(11.65,1.65) 81(11.15,1.65) 82(10.65,1.65) 83(10.15,1.65) 84(9.65,1.65) 85(9.15,1.65) 86(8.65,1.65) 87(8.15,1.65) 88(7.65,1.65) 89(7.15,1.65) 90(6.65,1.65) 91(6.15,1.65) 92(5.65,1.65) 93(5.15,1.65) 94(4.65,1.65) 95(4.15,1.65) 96(3.65,1.65) 97(3.15,1.65) 98(2.65,1.65) 99(2.15,1.65) 100(1.65,1.65)
  silkscreen extent -1.02,-14.73 16.38,2.67
TSSOP20 [mm]
  rect 2.15x0.45 smd: 1(0,0) 2(0,-0.65) 3(0,-1.3) 4(0,-1.95) 5(0,-2.6) 6(0,-3.25) 7(0,-3.9) 8(0,-4.55) 9(0,-5.2) 10(0,-5.85) 11(6.7,-5.85) 12(6.7,-5.2) 13(6.7,-4.55) 14(6.7,-3.9) 15(6.7,-3.25) 16(6.7,-2.6) 17(6.7,-1.95) 18(6.7,-1.3) 19(6.7,-0.65) 20(6.7,0)
  silkscreen extent -0.15,-6.6 5.23,1.18
XCYAI [mil]
  round 50 hole 32: 1(-100,0) 2(100,0)
  silkscreen extent -220,-100 212,97

## Part data
C1 C1 C1 C3 C3 C3 C4 C4 C4 C5 C5 C5 C6 C6 C6 C7 C7 C7 C9 C9 C9 C10 C10 C10 C11 C11 C11 C12 C12 C12 C13 C13 C13 C14 C14 C14 C15 C15 C15 C16 C16 C16 C17 C17 C17 C18 C18 C18 C19 C19 C19 C20 C20 C20 C21 C21 C21 C22 C22 C22 C23 C23 C23 C24 C24 C24 C25 C25 C25: library part Cap, "Capacitor"
C2 C2 C2 C8 C8 C8: library part "Cap Pol1", "Polarized Capacitor (Radial)"
D1 D1 D1 D4 D4 D4 D6 D6 D6: library part "D Schottky", "Schottky Diode"
D2 D2 D2: library part "D Zener", "Zener Diode"
D5 D5 D5: library part DIODE
F1 F1 F1: library part "Fuse 1", "Fuse"
J1 J1 J1 P1 P1 P1: library part "Header 5", "Header, 5-Pin"
L1 L1 L1: library part Inductor, "Inductor"
P2 P2 P2: library part "Header 3H", "Header, 3-Pin, Right Angle"
R1 R1 R1 R2 R2 R2 R3 R3 R3 R4 R4 R4 R5 R5 R5 R6 R6 R6 R7 R7 R7 R8 R8 R8 R9 R9 R9 R10 R10 R10 R11 R11 R11 R12 R12 R12 R13 R13 R13 R14 R14 R14 R15 R15 R15 R16 R16 R16 R17 R17 R17 R18 R18 R18 R19 R19 R19: library part Res2, "Resistor"
U2 U2 U2: library part GM6250

## Free pads (board coordinates)
  oct 157.48x157.48 hole 122.05: 1(7600,7400) 2(7600,5600) 3(5100,5600) 4(5100,7400)
  round 196.85 hole 137.8: ""(5296.94,4009.24) ""(5296.94,5347.82) ""(6497.73,4009.24) ""(6497.73,5347.82) ""(7514.94,4004.24) ""(7514.94,5342.82) ""(7903.24,5911.27) ""(7903.24,7112.06) ""(8715.73,4004.24) ""(8715.73,5342.82) ""(9241.82,5911.27) ""(9241.82,7112.06)

## Via types
v1: diameter 30, hole 16, Top Layer to Bottom Layer, 220 vias
v2: diameter 22, hole 12, Top Layer to Bottom Layer, 68 vias

## Nets (pads, with @x,y where several pads share a name; then routed paths per layer and width w, separated by ;. In a path a pad name is that pad's centre, name@x,y a point inside that pad or via, vN(x,y) a via of type N, cw(c..) or ccw(c..) an arc to the next point about the centre after c; other vN are vias at no path point)
+3.3VCOLL: C8.1@5420,6100 C9.2@5460,5992 C38.2 C39.2 C40.1 C41.1 C42.1 C45.2 C48.1 C49.2 C50.1 C51.2 D3.2 D4.2@7311,7462 R45.1 R49.1 R50.1 R55.2 R66.1 U2.5 U7.8 U8.8 U9.5 U10.5 U11.6 U14.5 | length 6393.7
  Top Layer w15: C39.2@6995,6100 6995,6119 7036,6160 7220,6160 7340,6280 7340,7081 7275,7146 ; v2(7090,7146) 7275,7146 ; C41.1@7135,6100 7135,6160 ; D4.2@7311,7462 7275,7426 7275,7146
  Top Layer w20: U8.8@6960,5790 7015,5790 7031,5774 7579,5774 C45.2@7580,5775 ; U7.8@6960,6020 6980,6020 6995,6035 C39.2@6995,6100 ; C38.2@7244,5620 7290,5666 7290,5774 ; R50.1@7395,5645 7400,5650 7400,5774
  Top Layer w30: D3.2@6635.59,5548.5 6688.5,5548.5 6700,5560 v1(6700,5595) ; v1(6900,5790) U8.8@6960,5790 ; v1(6900,6005) 6915,6020 U7.8@6960,6020
  Top Layer w40: U2.5@5360,5992 C9.2@5460,5992 ; R55.2@5400,6210 5400,6120 C8.1@5420,6100 ; 5420,5992 C8.1@5420,6100 ; 5710,6277 C49.2@5710,6211 5662,6211 5580,6129 C48.1@5580,6100 C8.1@5420,6100
  Bottom Layer w15: U14.5@7060,7160 7074,7146 v2(7090,7146)
  Bottom Layer w20: 5760,6183 5760,6359 5785,6384 C51.2@5785,6403 R66.1@5860,6403
  Bottom Layer w30: v1(6700,5595) 6855,5595 6900,5640 v1(6900,6005)
  Bottom Layer w40: v1@5460,6100 5677,6100 5760,6183 5970,6183 C50.1@5980,6193 6227,6193 6415,6005 v1(6900,6005)
  other v1: 5470,6100 5520,6100
+3.3VCOM: C52.1 C53.2 D4.3 R82.2 R83.2 U12.14 U12.19 U12.20 U13.8 | length 1922.1
  Top Layer w10: U12.14@6732.46,7069.29 6732.46,7180 6752.46,7200 6813,7200 6860.41,7152.59 U12.19@6860.41,7069.29
  Top Layer w20: U12.19@6862,7069.29 6910.71,7069.29 v2(6990,6990) ; v2(7110,7020) 7030,7100 7030,7180 C53.2@7070,7220 7089,7220 7130,7261 C52.1@7130,7406 ; C52.1@7120,7396 7148.99,7424.99 D4.3@7231,7424.99
  Bottom Layer w20: v2(6990,6990) 7035,6990 R82.2@7085,7040 ; v2(7110,7020) 7085,7045 R82.2@7085,7060 7093,7060 7113,7080 7360,7080 7385,7105 R83.2@7385,7360 ; 7385,7115 U13.8@7462,7115
+3.3VCORE: C13.1@5916,7070 C14.2@5945,6960 C23.2@6915,6427 C24.2@6380,6770 JP1.2 K1.2 K2.2 R16.2@6034,6870 R17.1@7585,7040 R18.2@6380,6600 R20.2 U3.5@5800,7005 U5.64 U5.92 | length 4335.8
  Top Layer w10: U5.92@6420.44,6801.96 6420.44,6739.56 v2(6430,6730) ; v2(6610,6520.47) 6839.53,6520.47 6860,6500 6860,6479 6912,6427 C23.2@6915,6427
  Top Layer w15: K1.2@7415,6851 7457,6893 7543,6893 7560,6910 7560,6996 7585,7021 R17.1@7585,7040
  Top Layer w20: v2(7380,6600) 7380,6628.52 K2.2@7415,6663.52
  Top Layer w30: R20.2@6915,6340 C23.2@6915,6427 ; K2.2@7415,6663.52 K1.2@7415,6851
  Top Layer w40: 5810,7000 5810,7024 5856,7070 C13.1@5916,7070 5945,7041 5945,6959 R16.2@6034,6870
  Bottom Layer w10: R18.2@6380,6600 6382,6600 6461.53,6520.47 v2(6610,6520.47)
  Bottom Layer w20: R18.2@6380,6600 6388,6600 6430,6642 v2(6430,6730) 6390,6770 C24.2@6380,6770 ; 6430,6700 6520,6700 6570,6750 7030,6750 7080,6700 7080,6606 7106,6580 7360,6580 v2(7380,6600)
  Bottom Layer w40: 5820,7010 5950,7010 6080,6880 6320,6880 6380,6820 C24.2@6380,6770 ; 6140,6880 6140,7021.26 JP1.2@6440,7321.26
  other v1: 5840,7010 5873,7015 5910,7015
+3.3VTRAN: D4.1@7311,7387 JP2.23 | length 540.4
  Top Layer w20: D4.1@7311,7387 7430,7268 7430,7023.14 JP2.23@7520,6933.14
+3.6V: C3.2@5450,6960 C4.1@5644,7320 C5.2@5540,7165 C6.1@5167,5801 C7.2@5110,5975 C11.1@5792.11,7320 C12.2@5800,7200 L1.2@5516.22,7340 R1.1@5365,6960 U2.1@5260,5992 U3.1@5800,7105 | length 3594.9
  Top Layer w20: C3.2@5450,6960 5500,6910 5570,6910 5590,6930 5590,7135 5560,7165 C5.2@5540,7165
  Top Layer w30: C7.2@5110,5975 5127,5992 U2.1@5260,5992 ; R1.1@5365,6960 C3.2@5450,6960 ; C11.1@5792.11,7320 5806,7306.11 U3.1@5806,7095
  Top Layer w40: 5170,5987 5170,5814 C6.1@5180,5804
  Top Layer w60: L1.2@5507,7320 C11.1@5792.11,7320 ; C5.2@5540,7175 L1.2@5540,7320
  Bottom Layer w40: v1(5170,5900) 5170,5950 5110,6010 5070,6010 5040,6040 5040,7100 5260,7320 5740,7320
  other v1: 5170,5940 5580,7320 5720,7320
AGND: C38.1 C39.1 C40.2 C41.2 C43.2 C44.1 D3.1 R29.1 R39.2 R48.2 U7.4 U8.4 | length 2535.7
  Top Layer w15: D3.1@6584.41,5548.5 6615.91,5580 6631,5580 6691,5640 U8.4@6740,5640
  Top Layer w20: C39.1@7060,6100 7060,6081 v1(7091,6050) 7169,6050 7200,6081 C41.2@7200,6100 R29.1@7275,6100 ; 7197,5555 7197,5653 C40.2@7244,5700
  Top Layer w30: R39.2@6501,5580 6552.91,5580 D3.1@6584.41,5548.5 ; U7.4@6740,5870 v1(6800,5870) ; C44.1@6975,5560 6980,5555 C38.1@7244,5555
  Bottom Layer w30: v1(6800,5870) 6800,5700 6760,5660 6630,5660 v1(6550,5580) 6575,5555 v1(7015,5555) 7091,5631 v1(7091,6050)
AVCC: C25.2@6200,6576 R18.1@6315,6600 U5.8@6198,6599.2 | length 209.7
  Top Layer w10: U5.8@6198,6599.2 6259.2,6599.2 v2(6270,6610)
  Bottom Layer w20: C25.2@6200,6576 6236,6576 v2(6270,6610) 6305,6610 R18.1@6315,6600
AVSS: C25.1@6200,6641 R19.1@6315,6685 U5.7@6198,6618.89 | length 218.1
  Top Layer w10: U5.7@6198,6618.89 6238.89,6618.89 v2(6270,6650)
  Bottom Layer w20: C25.1@6200,6641 6261,6641 6305,6685 R19.1@6315,6685
BLACK: JP3.21 JP3.22 RE1.3 | length 1391.1
  Bottom Layer w20: JP3.22@5101.26,6145.6 JP3.21@5180,6145.6 5280,6045.6 5280,5900 5610,5570 6002.6,5570 RE1.3@6120,5687.4
BLACK_R: R39.1 RE1.4 | length 357.7
  Top Layer w20: RE1.4@6120,5600.79 6180.79,5540 6396,5540 R39.1@6436,5580
BLACK_T: R32.1 RE1.2 | length 267.9
  Top Layer w20: R32.1@5990,5560 6060,5630 6060,5714.02 RE1.2@6120,5774.02
COLL_PWR_CN: R4.1@5280,5845 R12.1@5512,5759.98 U2.3@5260,5917 U5.25 | length 1258.4
  Top Layer w10: U2.3@5260,5917 5260,5852 5312,5800 5471.98,5800 5521.98,5750 v2(5620,5750) ; v2(6050,6150) 6164.56,6264.56 U5.25@6198,6264.56
  Bottom Layer w10: v2(5620,5750) 5650,5750 v2(6050,6150)
CORE_PWR_CN: R5.1@5640,7100 R13.1@5843.98,6870 U3.3@5725,7105 U5.10 | length 853.3
  Top Layer w10: U3.3@5725,7105 5725,7083 5755,7053 5755,6958.98 R13.1@5843.98,6870 ; v2(6140,6580) 6160.16,6559.84 U5.10@6198,6559.84
  Bottom Layer w10: v2(5794,6920) 5827,6920 6140,6607 v2(6140,6580)
DGND: BT1.2 C1.2@5070,7196 C2.1@5055,7071.94 C4.2@5644,7430 C5.1@5540,7100 C6.2@5057,5801 C7.1@5110,5910 C8.2@5310,6100 C9.1@5460,5927 C10.1@5485,5845 C11.2@5792.11,7430 C12.1@5735,7200 C13.2@5916,7180 C14.1@5880,6960 C15.1@5640,6960 C16.2@5305,6585 C17.1@5429.06,6655 C18.2@5420,6564 C19.1@6380,6515 C20.1@6344,7160 C21.1@6434,7160 C22.1@5943.98,6870 C23.1@6980,6427 C24.1@6315,6770 C26.2 C27.2 C28.2 C29.1 C30.2 C31.2 C45.1 C46.2 C47.2 C48.2 C49.1 C50.2 C51.1 C52.2 C53.1 C55.1 C57.1 C58.1 JP1.9 JP2.24 JP3.2 JP3.4 JP3.6 pad.1 pad.2 pad.3 pad.4 Q3.2 Q4.2 Q5.2 R2.2@5540,7025 R3.2@5280,6960 R4.2@5345,5845 R5.2@5640,7165 R7.2@5710,6720 R14.2@5427,5759.98 R15.2@5758.98,6870 R19.2@6380,6685 R25.1 R26.1 R29.2 R31.2 R32.2 R33.1 R46.2 R56.1 R62.2 R63.2 R68.2 R69.2 S1.1 TR1.2 U1.2@5400,7131 U2.2@5260,5955 U3.2@5763,7105 U4.2@5621,6692 U5.18 U5.67 U5.95 U6.4@5770,5650 U6.5@5990,5650 U9.2 U10.4 U11.4 U12.1 U12.18 U13.5 U14.3 Y2.2 Y2.3 | length 7445.9
  Top Layer w10: C46.2@6012,6360 6027,6360 6087,6420 6127,6420 6144.65,6402.35 v1@6299.65,6402.35 ; 6420,6600 6361.39,6658.61 6361.39,6898.61 6315,6945 6255,6945 6220,6980 6220,7180 6255,7215 6301,7215 6344,7172 C20.1@6344,7160 C21.1@6434,7160 ; 6560,6480 6560,6520 6600,6560 6740,6560 6759.52,6579.52 6864.52,6579.52 6900,6615 6900,6640 6929,6669 6992,6669 7020,6641 C27.2@7020,6629 ; v1(6780,7160) 6800,7160 6834.82,7125.18 U12.18@6834.82,7069.29 ; C23.1@6980,6427 7025,6382 7093,6382 7125,6414 C26.2@7125,6427
  Top Layer w15: R3.2@5280,6960 5264,6960 5232,6992 5232,7101 5255,7124 5368,7124 5375,7131 U1.2@5400,7131
  Top Layer w20: C7.1@5110,5910 5110,5869 5057,5816 C6.2@5057,5801 5057,5786 5123,5720 5191,5720 5230,5759 5230,5864 5210,5884 5210,5934 5231,5955 5289,5955 5310,5934 5310,5898 5345,5863 R4.2@5345,5845 ; 5230,5770 5344.01,5770 Q3.2@5349.01,5765 5421.98,5765 R14.2@5427,5759.98 ; 5294,5950 5437,5950 C9.1@5460,5927 ; C8.2@5310,6100 5310,6230 5350,6270 5485,6270 5504.23,6289.23 U10.4@5531,6289.23 ; U1.2@5400,7131 5490,7131 5540,7081 R2.2@5540,7025 ; C17.1@5429.06,6655 5448,6655 5483,6690 5661,6690 5691,6720 R7.2@5710,6720 ; R56.1@5500,6460 5500,6445 5545,6400 5574,6400 5640,6334 v1(5640,6260) ; C12.1@5735,7200 5735,7181 5763,7153 U3.2@5763,7105 ; R62.2@5800,6146 5850,6096 5850,6066 5881,6035 R33.1@5900,6035 5909,6026 TR1.2@5980,6026 ; U12.1@6888,7333 6932,7333 C57.1@6980,7285 ; pad.2@7560,5600 7630,5670 7630,5809 7599,5840 C45.1@7580,5840 ; BT1.2@7580,7120 7606,7120 7630,7096 7630,6964.4 JP2.24@7598.74,6933.14
  Top Layer w30: v1(5720,5660) 5730,5650 U6.4@5770,5650 ; v1(6955,6865) R25.1@7090,6865 ; R29.2@7340,6100 7404,6100 7580,5924 C45.1@7580,5840 ; U9.2@7363,5825 7363,6100
  Top Layer w40: R46.2@7395,5560 7520,5560 pad.2@7560,5600
  Bottom Layer w10: C58.1@7032,7360 7000,7328 7000,7247 7027,7220 7118,7220 7135,7237 U14.3@7135,7260
  Bottom Layer w15: C24.1@6315,6770 6315,6761 6380,6696 R19.2@6380,6685
  Bottom Layer w20: U11.4@5857.8,6293 5970,6293 C50.2@5980,6303
  other v1: 5720,5610 5880,5640 5920,5640 5910,5690 5571,5874 5620,5900 5680,5900 5670,5960 5713,5993 6060,6280 6110,6280 6380,6300 6460,6300 6540,6300 5635,6320 6060,6340 6110,6340 6460,6380 6540,6380 6300,6400 6380,6460 6540,6460 6480,6580 6540,6640 5760,6748 5714,6848 5900,6910 5700,6940 5240,6960 6070,7100 6680,7160 5467,7200 5685,7208 6680,7210 5611,7218 6440,7220 5860,7250 5460,7252 7024,7316 5320,7440 5400,7440 5480,7440 5560,7440 5880,7440 6980,7460
  other v2: 7163,7300 7194,7300
DTU_DCD: JP2.2 U5.48 | length 1034
  Top Layer w10: U5.48@6696.03,6199.6 6696.03,6156.97 6708,6145 6965,6145 v2(6980,6160)
  Bottom Layer w10: v2(6980,6160) 7326,6160 7466,6020 7551.74,6020 JP2.2@7598.74,6067
DTU_ONOFF: JP2.1 U5.49 | length 950.4
  Top Layer w10: U5.49@6715.72,6199.6 6715.72,6240 6730.72,6255 6750,6255 v2(6771,6234)
  Bottom Layer w10: v2(6771,6234) 6771,6197 6783,6185 7338,6185 7456,6067 JP2.1@7520,6067
GREEN: JP3.9 JP3.10 R24.2 | length 951.8
  Top Layer w10: v2(5950,6710) R24.2@6000,6710
  Bottom Layer w10: JP3.10@5101.26,6618.04 5221.96,6618.04 5240,6600 5720,6600 5830,6710 v2(5950,6710)
IN0+: R23.1 U5.1@6198,6737 | length 328.2
  Top Layer w10: R23.1@5900,6710 5950,6760 6145,6760 6168,6737 U5.1@6198,6737
IN0-: R24.1 U5.2@6198,6717.31 | length 136
  Top Layer w10: R24.1@6065,6710 6072.31,6717.31 U5.2@6198,6717.31
IN1+: R57.2 U5.3@6198,6697.63 U10.8 | length 843.2
  Top Layer w10: U10.8@5708.17,6366 5681,6366 5640,6407 5640,6473 5677,6510 5720,6510 5745,6535 5745,6605 5800,6660 6087,6660 6124.63,6697.63 U5.3@6198,6697.63
IN1-: R63.1 U5.4@6198,6677.94 | length 623.7
  Top Layer w10: R63.1@5715,6460 5715,6472 5765,6522 5765,6596 5809,6640 6096,6640 6133.94,6677.94 U5.4@6198,6677.94
IN2+: R52.1 U5.5@6198,6658.26 | length 161.3
  Top Layer w10: R52.1@6065,6590 6077,6590 6145.26,6658.26 U5.5@6198,6658.26
IN2-: R54.1 U5.6@6198,6638.57 | length 212.9
  Top Layer w10: R54.1@6065,6505 6067,6505 6105,6543 6105,6585 6158.57,6638.57 U5.6@6198,6638.57
IN4+: U5.12
IN4-: U5.13
IN5+: U5.14
IN5-: U5.15
LCDCAP: U5.63
MCURXD0: R72.1 R81.1 U5.78 | length 402.4
  Top Layer w10: U5.78@6696.03,6801.96 6696.03,6840.03 6716,6860 6790,6860 R72.1@6830,6900 6800,6930 v2(6800,6934)
  Bottom Layer w10: v2(6800,6934) 6880,7014 R81.1@6880,7060
MCURXD1: R77.1 R85.1 U5.84 | length 953.5
  Top Layer w10: R77.1@6570,7280 6570,7250 v2(6600,7220) ; U5.84@6577.92,6801.96 6577.92,6847.92 v2(6600,6870)
  Bottom Layer w10: v2(6600,6870) 6600,7273 6647,7320 6780,7320 6830,7270 6830,7210 R85.1@6880,7160
MCUTXD0: R70.1 R79.1 U5.79 | length 1055.5
  Top Layer w10: U5.79@6676.35,6801.96 6676.35,6856.65 v2(6676,6857) 6679,6860 6687,6860 6727,6900 R70.1@6745,6900
  Bottom Layer w10: v2(6676,6857) 6654,6835 6592,6835 6570,6857 6570,7277 6633,7340 6800,7340 R79.1@6880,7260
MCUTXD1: R74.1 R88.1 U5.85 | length 979.2
  Top Layer w10: v2(6540,6880) 6556.47,6880 6558.24,6878.24 ; U5.85@6558.24,6801.96 6558.24,6878.24 ; R74.1@6660,6900 6580,6900 6558.24,6878.24
  Bottom Layer w10: v2(6540,6880) 6540,7280 6620,7360 R88.1@6880,7360
NetBT1_1: BT1.1 R17.2@7520,7040 | length 241.3
  Top Layer w20: R17.2@7520,7040 7490,7070 7490,7164 7526,7200 BT1.1@7580,7200
NetC3_1: C3.1@5450,7025 R1.2@5365,7025 R3.1@5280,7025 U1.5@5300,7094 | length 170
  Top Layer w30: R3.1@5280,7025 C3.1@5450,7025
NetC10_2: C10.2@5420,5845 U2.4 | length 102.7
  Top Layer w20: U2.4@5360,5917 5370,5917 5420,5867 C10.2@5420,5845
NetC15_2: C15.2@5640,7025 U3.4@5725,7005
NetC20_2: C20.2@6279,7160 U5.94 Y1.1 | length 440.2
  Top Layer w10: C20.2@6279,7160 6292,7147 Y1.1@6292,7000 6360,7000 6381.07,6978.93 U5.94@6381.07,6801.96
NetC21_2: C21.2@6499,7160 U5.93 Y1.2 | length 440.9
  Top Layer w10: U5.93@6400.76,6801.96 6400.76,6980.76 6420,7000 Y1.2@6492,7000 6492,7153 C21.2@6499,7160
NetC26_1: C26.1 U5.65 Y2.1 | length 306.5
  Top Layer w10: U5.65@6800.36,6540.15 6854.85,6540.15 6879,6516 6971,6516 C26.1@7060,6427
NetC27_1: C27.1 U5.66 Y2.4 | length 210.2
  Top Layer w10: U5.66@6800.36,6559.84 6891.6,6559.84 Y2.4@6900,6551.43 6911.43,6551.43 6955,6595 C27.1@6955,6629
NetC30_1: C30.1 C31.1 D2.2@6174,6000 R28.2 RE1.1 | length 503.9
  Top Layer w30: C31.1@5805,6048.06 5805,6005 5861,5949 6120,5949 ; RE1.1@6120,5900 6120,5949 ; D2.2@6175,5994 6165,5994 6120,5949
NetC32_1: C32.1 C37.2 R34.1 U8.1 | length 317
  Top Layer w20: C37.2@6440,5811 6450,5821 6669,5821 6700,5790 U8.1@6740,5790
NetC32_2: C32.2 R34.2 R37.1 U8.2 | length 280.4
  Top Layer w20: R34.2@6530,5765 6555,5740 U8.2@6740,5740 ; R37.1@6645,5680 6645,5740
NetC33_1: C33.1 C36.2 R35.1 U7.1 | length 254.1
  Top Layer w20: R35.1@6530,6077 6718,6077 6740,6055 U7.1@6740,6020
NetC33_2: C33.2 R35.2 R38.1 U7.2 | length 333.3
  Top Layer w20: R38.1@6440,6031 6450,6021 6619,6021 C33.2@6628,6012 ; C33.2@6620,6012 6668,6012 6710,5970 U7.2@6740,5970
NetC34_1: C34.1 R36.1 R44.1 R47.2 U7.7 | length 370.4
  Top Layer w20: U7.7@6960,5970 7011,5970 7036,5995 R44.1@7235,5995 R47.2@7235,5910
NetC34_2: C34.2 R36.2 R40.1 U7.6 | length 489.4
  Top Layer w20: R40.1@6920,6100 6920,6081 6860,6021 6860,5940 6880,5920 7026,5920 7041,5935 R36.2@7150,5935
NetC35_1: C35.1 D3.3 R37.2 | length 159.9
  Top Layer w20: C35.1@6501,5680 R37.2@6580,5680 6580,5641.49 D3.3@6610,5611.49
NetC36_1: C36.1 R40.2 | length 75
  Top Layer w20: C36.1@6780,6100 R40.2@6855,6100
NetC37_1: C37.1 R38.2 | length 90
  Top Layer w20: C37.1@6440,5876 R38.2@6440,5966
NetC42_2: C42.2 C43.1 R45.2 R48.1 U8.5 | length 368.3
  Top Layer w20: U8.5@6960,5640 7000,5640 7020,5620 C43.1@7150,5620 ; R48.1@7060,5620 R45.2@7060,5700 C42.2@7150,5700
NetC44_2: C44.2 R41.2 R42.2 R43.2 U8.6 U8.7 | length 973.4
  Top Layer w20: R42.2@6625,5910 6705,5830 7040,5830 R43.2@7055,5845 ; R41.2@6835,5560 C44.2@6910,5560 ; R41.2@6851,5560 6851,5830 ; 6851,5690 U8.6@6960,5690 U8.7@6960,5740
NetC46_1: C46.1 R51.1 R52.2 | length 261.5
  Top Layer w10: R52.2@6000,6590 6032,6558 6032,6445 C46.1@6012,6425
  Top Layer w20: R51.1@5925,6590 R52.2@6000,6590
NetC47_1: C47.1 R53.1 R54.2 | length 160.4
  Top Layer w20: C47.1@5912,6425 5925,6438 R53.1@5925,6505 R54.2@6000,6505
NetC54_1: C54.1 U12.4 | length 126
  Top Layer w10: U12.4@6809.23,7333.07 6809.23,7394.3 C54.1@6855,7440.07
NetC54_2: C54.2 U12.2 | length 139.9
  Top Layer w10: U12.2@6860.41,7333.07 6860.41,7380.41 6876,7396 6890,7396 6920,7426 C54.2@6920,7440.07
NetC55_2: C55.2 U12.7 | length 167.5
  Top Layer w10: C55.2@6640,7440 6682,7398 6720,7398 6732.46,7385.54 U12.7@6732.46,7333.07
NetC56_1: C56.1 U12.6 | length 124.8
  Top Layer w10: C56.1@6715,7440.07 6715,7432 6758.05,7388.95 U12.6@6758.05,7333.07
NetC56_2: C56.2 U12.5 | length 108.5
  Top Layer w10: C56.2@6780,7440.07 6783.64,7436.43 U12.5@6783.64,7333.07
NetC57_2: C57.2 U12.3 | length 224.2
  Top Layer w10: U12.3@6834.82,7333.07 6834.82,7278.18 6893,7220 C57.2@6980,7220
NetC58_2: C58.2 D5.1@7155,7440 R89.1 U14.2 | length 255
  Bottom Layer w20: U14.2@7097,7260 C58.2@7097,7360 R89.1@7172,7360 ; R89.1@7155,7360 D5.1@7155,7440
NetD1_1: D1.1@7070,6335 R20.1 | length 92.1
  Top Layer w20: R20.1@6980,6340 6985,6335 D1.1@7070,6335
NetD1_2: D1.2@7150,6335 Q5.3 | length 114.7
  Top Layer w20: D1.2@7150,6335 7259.01,6335 Q5.3@7263.01,6331
NetD2_1: D2.1@6274,6000 RE1.8 TR1.3 | length 359.2
  Top Layer w20: TR1.3@6060,6063.01 6091.01,6032 6242,6032 6320,5954 RE1.8@6320,5900
NetD5_2: D5.2@7255,7440 R79.2 R83.1 R88.2 R89.2 U13.4 | length 719.2
  Bottom Layer w10: R79.2@6945,7260 7005,7200 7146,7200 7211,7265 U13.4@7242,7265
  Bottom Layer w20: R79.2@6945,7260 R88.2@6945,7360 ; R89.2@7237,7360 R83.1@7320,7360 ; U13.4@7242,7265 7237,7265 7237,7422 D5.2@7255,7440
NetL1_1: L1.1@5280,7340 U1.3@5400,7169 | length 200.7
  Top Layer w60: L1.1@5280,7340 5400,7220 5400,7189
NetQ1_1: Q1.1 R8.2@5359.99,5620.02 R10.1@5274.99,5620.02 | length 178.1
  Top Layer w20: R10.1@5274.99,5620.02 5446.02,5620.02 Q1.1@5451,5625
NetQ2_1: Q2.1 R9.2@5428.99,6805 R11.1@5515.99,6805 | length 167.1
  Top Layer w20: Q2.1@5351,6800 5510.99,6800 R11.1@5515.99,6805
NetQ3_1: Q3.1 R12.2@5512,5694.98 R14.1@5427,5694.98 | length 165.1
  Top Layer w20: Q3.1@5349.01,5690 5507.02,5690 R12.2@5512,5694.98
NetQ3_3: Q3.3 R10.2@5274.99,5555.02 | length 210.7
  Top Layer w10: Q3.3@5269.01,5727.99 5235,5693.98 5235,5583 5262.98,5555.02 R10.2@5274.99,5555.02
NetQ4_1: Q4.1 R13.2@5843.98,6805 R15.1@5758.98,6805 | length 165.1
  Top Layer w20: Q4.1@5680.99,6800.02 5839,6800.02 R13.2@5843.98,6805
NetQ4_3: Q4.3 R11.2@5515.99,6870 | length 98.3
  Top Layer w20: R11.2@5515.99,6870 5569,6870 Q4.3@5600.99,6838.01
NetQ5_1: Q5.1 R22.1 | length 82.1
  Top Layer w10: R22.1@7296,6491 7301,6486 Q5.1@7301,6411
NetQ6_1: Q6.1 R67.2 | length 130.1
  Bottom Layer w20: R67.2@5360,6303 5440,6383 Q6.1@5440,6400
NetQ6_2: Q6.2 R69.1 U11.3 | length 175.4
  Bottom Layer w20: Q6.2@5515,6400 5579,6400 R69.1@5580,6401 ; U11.3@5580,6293 R69.1@5580,6403
NetQ6_3: Q6.3 R64.2 U11.1 | length 212.5
  Bottom Layer w20: Q6.3@5477.99,6320 5500,6297.99 R64.2@5500,6203 5510,6193 U11.1@5582.2,6193
NetR6_2: R6.2@5695,6568.37 R7.1@5710,6655 U4.1@5621,6655 | length 175.6
  Top Layer w20: U4.1@5621,6655 R7.1@5710,6655 ; R6.2@5695,6568.37 R7.1@5695,6655
NetR21_2: R21.2 U5.54 | length 944.7
  Top Layer w10: v2(6740,6289) 6740,6300 6763.61,6323.61 U5.54@6800.36,6323.61 ; v2(7400,6040) 7400,6020 R21.2@7420,6000
  Bottom Layer w10: v2(6740,6289) 6740,6200 6810,6130 7310,6130 v2(7400,6040)
NetR30_2: R30.2 R33.2 TR1.1 | length 256.6
  Top Layer w20: R33.2@5900,6100 5910,6110 6110,6110 R30.2@6140,6080
NetR41_1: R41.1 U8.3 | length 204.9
  Top Layer w20: U8.3@6740,5690 6790,5690 6810,5670 6810,5619 6770,5579 R41.1@6770,5560
NetR42_1: R42.1 U7.3 | length 229
  Top Layer w20: R42.1@6560,5910 6560,5930 6590,5960 6660,5960 6700,5920 U7.3@6740,5920
NetR43_1: R43.1 U7.5 | length 198.9
  Top Layer w20: U7.5@6960,5870 7005,5870 7026,5891 7093,5891 7120,5864 R43.1@7120,5845
NetR46_1: R46.1 R50.2 U9.4 | length 167.1
  Top Layer w20: U9.4@7325,5725 7325,5565 R46.1@7330,5560
NetR47_1: R47.1 U9.3 | length 95.4
  Top Layer w20: R47.1@7300,5910 7325,5885 U9.3@7325,5825
NetR55_1: R55.1 R56.2 U10.1 | length 413.5
  Top Layer w10: R56.2@5435,6460 5435,6455 5509,6381 5509,6377 U10.1@5520,6366 ; R55.1@5465,6210 5505,6250 5550,6250 5585,6285 5585,6339 5558,6366 U10.1@5517,6366
NetR57_1: R57.1 R60.1 U10.7 | length 295.5
  Top Layer w10: R57.1@5575,6460 5575,6438 5672.59,6340.41 5769.41,6340.41 5789,6360 R60.1@5800,6360
NetR58_1: R58.1 R59.1 U10.2 | length 212.3
  Top Layer w10: R58.1@5360,6440 5365,6440 5425,6380 5453,6380 5492.59,6340.41 U10.2@5531,6340.41
NetR59_2: R59.2 R61.1 U10.3 | length 187.6
  Top Layer w10: R61.1@5360,6355 5400.18,6314.82 U10.3@5531,6314.82
NetR60_2: R60.2 R62.1 U10.6 | length 184
  Top Layer w10: U10.6@5708.17,6314.82 5767.18,6314.82 5787,6295 R60.2@5800,6295
  Top Layer w20: R62.1@5800,6211 R60.2@5800,6295
NetR70_2: R70.2 U12.13 | length 120.1
  Top Layer w10: U12.13@6706.87,7069.29 6706.87,7003.13 R70.2@6745,6965
NetR72_2: R72.2 U12.15 | length 245.3
  Top Layer w10: U12.15@6758.05,7069.29 6758.05,7015.95 6829,6945 6862,6945 6895,6912 R72.2@6895,6900
NetR74_2: R74.2 U12.12 | length 113.1
  Top Layer w10: R74.2@6660,6965 6681.28,6986.28 U12.12@6681.28,7069.29
NetR77_2: R77.2 U12.10 | length 90.6
  Top Layer w10: R77.2@6570,7345 6643.76,7345 U12.10@6655.69,7333.07
NetR78_1: R78.1 R84.1 R86.2 U13.7 | length 942.6
  Bottom Layer w10: R84.1@7145,6760 7070,6835 7070,6943 7087,6960 R78.1@7145,6960
  Bottom Layer w20: R78.1@7145,6960 7145,7005 7190,7050 7490,7050 7560,7120 R86.2@7560,7158 7553,7165 U13.7@7462,7165
NetR80_1: R80.1 R86.1 R87.1 U13.6 | length 1054.4
  Top Layer w10: v2(7309,6631) 7315,6637 7315,7005 v2(7310,7010)
  Bottom Layer w10: v2(7309,6631) 7320,6642 R87.1@7320,6675
  Bottom Layer w20: R80.1@7320,6960 7320,7000 7340,7020 7520,7020 7610,7110 7610,7193 7580,7223 R86.1@7560,7223 7552,7215 U13.6@7462,7215
NetR81_2: R81.2 R82.1 R85.2 U13.1 | length 452
  Bottom Layer w20: R81.2@6945,7060 R85.2@6945,7160 ; 6945,7115 U13.1@7242,7115 ; R82.1@7020,7060 7020,7115
NetU13_2: U13.2 U13.3 U14.4 | length 159.1
  Bottom Layer w20: U14.4@7135,7160 7140,7165 U13.2@7242,7165 U13.3@7242,7215
P1.0: U5.91
P1.1: R22.2 U5.90 | length 1105.7
  Top Layer w10: v2(6440,6865) 6459.81,6845.19 U5.90@6459.81,6801.96 ; v2(6920,6800) 6960,6760 7013,6760 7090,6683 7090,6610 7115,6585 7208,6585 7231,6562 R22.2@7231,6491
  Bottom Layer w10: v2(6440,6865) 6510,6795 6915,6795 v2(6920,6800)
P1.2: K2.1 R26.2 U5.89 | length 887.4
  Top Layer w10: U5.89@6479.5,6801.96 v2(6479.5,6865.5) ; v2(6960,6800) R26.2@7000,6800 7136.48,6663.52 K2.1@7199,6663.52
  Bottom Layer w10: v2(6479.5,6865.5) 6529.99,6815 6795,6815 6820,6840 6920,6840 v2(6960,6800)
P1.3: K1.1 R25.2 U5.88 | length 837.3
  Top Layer w10: U5.88@6499.18,6801.96 6499.18,6740.82 v2(6500,6740) ; v2(7080,6760) 7080,6790 R25.2@7090,6800 7102,6800 7110,6800 7161,6851 K1.1@7199,6851
  Bottom Layer w10: v2(6500,6740) 6535,6775 7065,6775 v2(7080,6760)
P1.4: U5.87
P2.0: U5.83
P2.1: U5.82
P2.2: U5.81
P2.3: U5.80
P2.7: JP2.17 U5.76 | length 1027.1
  Top Layer w10: U5.76@6735.4,6801.96 6878.04,6801.96 6940,6740 6990,6740 v2(7045,6685)
  Bottom Layer w10: v2(7045,6685) 7045,6602 7092,6555 7378.08,6555 7450,6626.92 7450,6683 7463.92,6696.92 JP2.17@7520,6696.92